# EAGLE board uirrc2 (EAGLE 9.6.2)
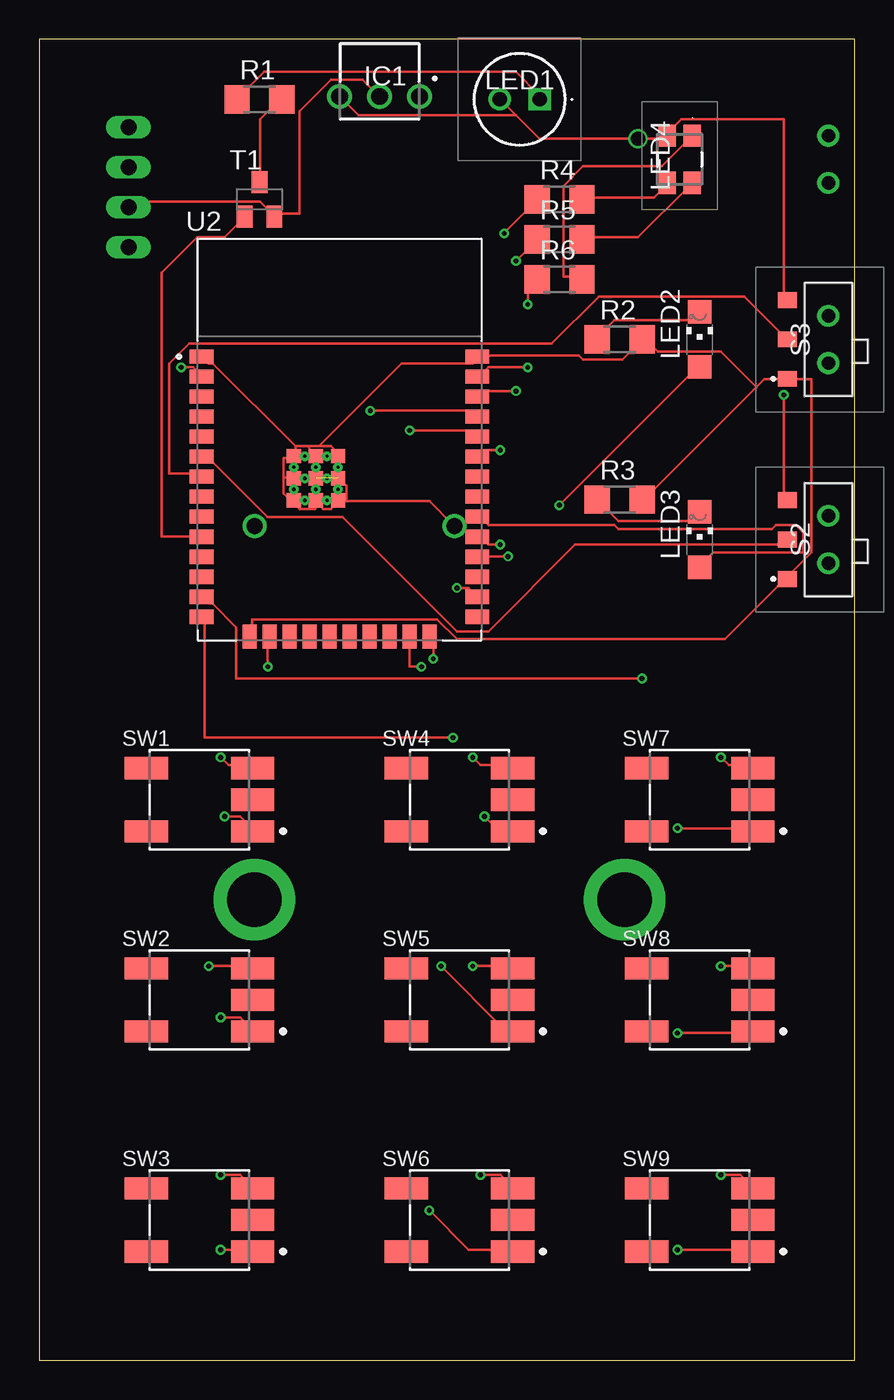
[diagram p0: board, top side]
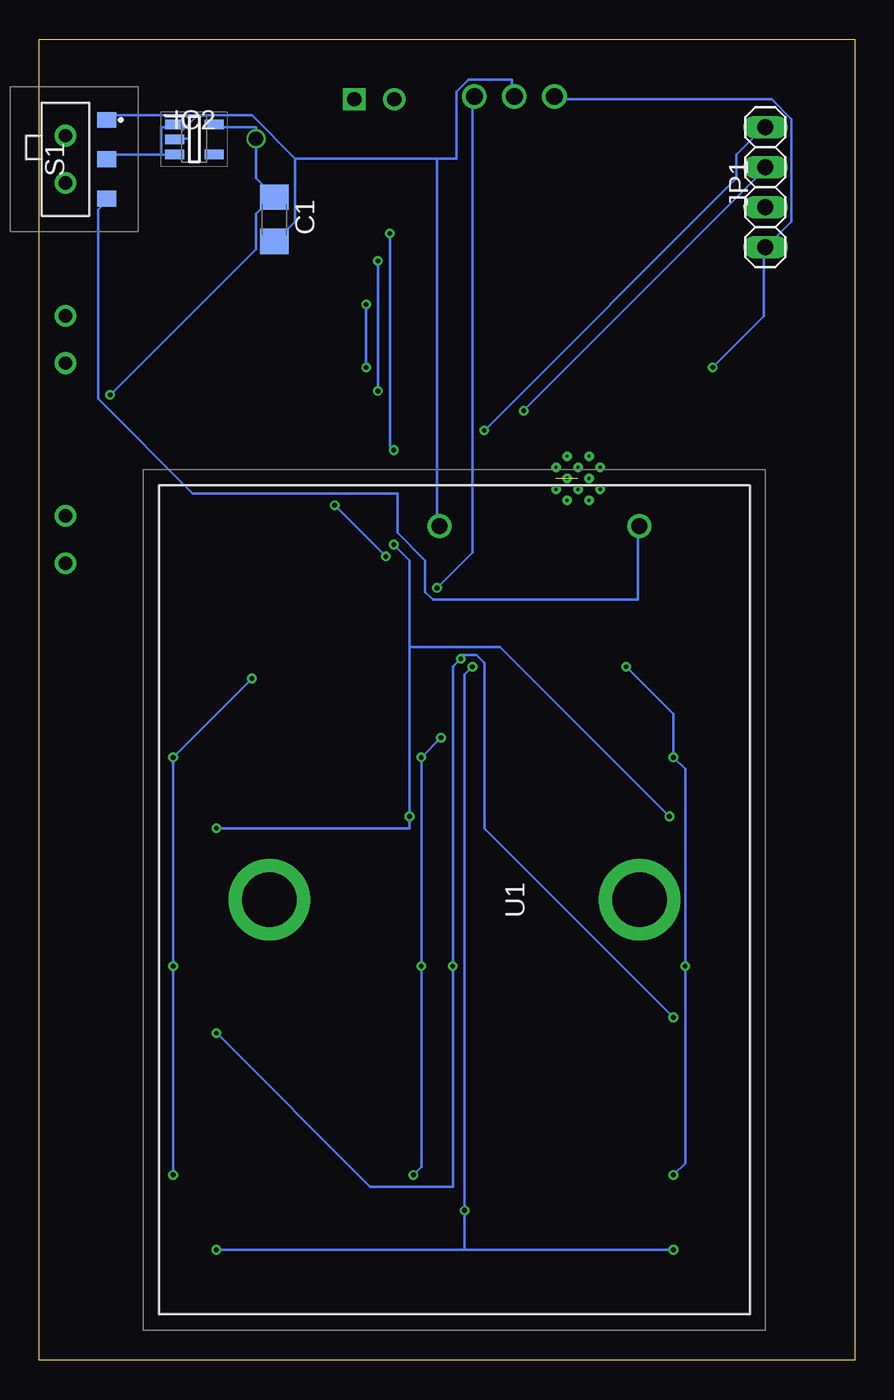
[diagram p1: board, bottom side, seen from below]

Size 51.74 x 83.81 mm. Coordinates in mm from the lower left corner, seen from the top.
Outline: 0,0 51.74,0 51.74,83.81 0,83.81 0,0
Copper layers (1*16): Top 0.035mm / dielectric 1.5mm / Bottom 0.035mm
Design rules "DesignRules": minimum track width 6mil, minimum drill 12mil, track to track 6mil, track to pad 6mil, pad to pad 6mil, via to via 6mil, smd to smd 6mil, copper to edge 20mil, drill to drill 8mil, minimum pad ring 8mil, minimum via ring 6mil, stop-mask expansion 3mil, vias tented up to drill 0mil, thermal gap 8mil

## Footprints (pad centres in the part's own frame; a part is rotated, then mirrored left to right if it is on the bottom)
C1206 = smd 1.6 x 1.8: 1 -1.4,0; 2 1.4,0
TSOP38238 = drill 1.06 pad 1.56: 1 -2.54,-1.45; 2 0,-1.45; 3 2.54,-1.45
SOT95P280X145-5N = smd 1.2 x 0.6: 1 -1.25,0.95; 2 -1.25,0; 3 -1.25,-0.95; 4 1.25,-0.95; 5 1.25,0.95
1X04 = drill 1.016 long: 1 -3.81,0; 2 -1.27,0; 3 1.27,0; 4 3.81,0
LTE4208 = drill 0.91 pad 1.416 square: 1 0,0 | drill 0.91 pad 1.416: 2 -2.54,0
CHIPLED_1206 = smd 1.5 x 1.5: A 0,-1.75; C 0,1.75
CLVBAFKACAEDH8BBB7A363 = smd 1.4 x 1.1: 1 -1.5,0.8; 2 -1.5,-0.8; 3 1.5,0.8; 4 1.5,-0.8
R1206 = smd 1.6 x 1.803: 1 -1.422,0; 2 1.422,0
AYZ0102AGRLC = smd 1 x 1.2: 1 -2.5,2.05; 2 0,2.05; 3 2.5,2.05 | drill 0.85 pad 1.381: 4 -1.5,-0.55; 5 1.5,-0.55
OMRON_B3SN-3112P_0 = smd 2.75 x 1.4: 1 3.375,-2; 2 -3.375,-2; 3 3.375,2; 4 -3.375,2; 5 3.375,0
SOT23-BEC = smd 1 x 1.4: B -0.95,-1.1; C 0,1.1; E 0.95,-1.1
2479 = drill 1.02 pad 1.53: 1 23.725,-11.75; 2 23.725,0.95 | drill 3.45 pad 5.175: 3 0.005,-11.75; 4 0.005,11.75
XCVR_ESP32-WROOM-32E_(16MB) = smd 1.5 x 0.9: 1 -8.75,5.26; 2 -8.75,3.99; 3 -8.75,2.72; 4 -8.75,1.45; 5 -8.75,0.18; 6 -8.75,-1.09; 7 -8.75,-2.36; 8 -8.75,-3.63; 9 -8.75,-4.9; 10 -8.75,-6.17; 11 -8.75,-7.44; 12 -8.75,-8.71; 13 -8.75,-9.98; 14 -8.75,-11.25; 25 8.75,-11.25; 26 8.75,-9.98; 27 8.75,-8.71; 28 8.75,-7.44; 29 8.75,-6.17; 30 8.75,-4.9; 31 8.75,-3.63; 32 8.75,-2.36; 33 8.75,-1.09; 34 8.75,0.18; 35 8.75,1.45; 36 8.75,2.72; 37 8.75,3.99; 38 8.75,5.26 | smd 0.9 x 1.5: 15 -5.715,-12.5; 16 -4.445,-12.5; 17 -3.175,-12.5; 18 -1.905,-12.5; 19 -0.635,-12.5; 20 0.635,-12.5; 21 1.905,-12.5; 22 3.175,-12.5; 23 4.445,-12.5; 24 5.715,-12.5 | smd 0.9 x 0.9: 39_1 -2.9,-1.06; 39_2 -1.5,-1.06; 39_3 -0.1,-1.06; 39_4 -2.9,-2.46; 39_5 -1.5,-2.46; 39_6 -0.1,-2.46; 39_7 -2.9,-3.86; 39_8 -1.5,-3.86; 39_9 -0.1,-3.86 | drill 0.2 pad 0.3: 39_10 -2.2,-1.06; 39_11 -0.8,-1.06; 39_12 -2.9,-1.76; 39_13 -1.5,-1.76; 39_14 -0.1,-1.76; 39_15 -2.2,-2.46; 39_16 -0.8,-2.46; 39_17 -2.9,-3.16; 39_18 -1.5,-3.16; 39_19 -0.1,-3.16; 39_20 -2.2,-3.86; 39_21 -0.8,-3.86

## Placement (x,y rotation side)
C1  1.0uF  [C1206]  36.83,72.39 270 bottom
IC1  TSOP38438  [TSOP38238]  21.59,78.74 180 top
IC2  MIC5205-3.3YM5-TR  [SOT95P280X145-5N]  41.91,77.47 0 bottom
JP1  [1X04]  5.66,74.44 90 bottom
LED1  LTE-4208  [LTE4208]  31.75,80.01 0 top
LED2  [CHIPLED_1206]  41.91,64.77 0 top
LED3  [CHIPLED_1206]  41.91,52.07 0 top
LED4  CLVBA-FKA-CAEDH8BBB7A363  [CLVBAFKACAEDH8BBB7A363]  40.64,76.2 270 top
R1  100  [R1206]  13.97,80.01 0 top
R2  471  [R1206]  36.83,64.77 0 top
R3  471  [R1206]  36.83,54.61 0 top
R4  471  [R1206]  33.02,73.66 0 top
R5  471  [R1206]  33.02,71.12 0 top
R6  471  [R1206]  33.02,68.58 0 top
S1  AYZ0102AGRLC  [AYZ0102AGRLC]  49.53,76.2 270 bottom
S2  AYZ0102AGRLC  [AYZ0102AGRLC]  49.53,52.07 90 top
S3  AYZ0102AGRLC  [AYZ0102AGRLC]  49.53,64.77 90 top
SW1  OMRON_B3SN-3112POMRON_B3SN-3112P_0_0  [OMRON_B3SN-3112P_0]  10.16,35.56 0 top
SW2  OMRON_B3SN-3112POMRON_B3SN-3112P_0_0  [OMRON_B3SN-3112P_0]  10.16,22.86 0 top
SW3  OMRON_B3SN-3112POMRON_B3SN-3112P_0_0  [OMRON_B3SN-3112P_0]  10.16,8.89 0 top
SW4  OMRON_B3SN-3112POMRON_B3SN-3112P_0_0  [OMRON_B3SN-3112P_0]  26.67,35.56 0 top
SW5  OMRON_B3SN-3112POMRON_B3SN-3112P_0_0  [OMRON_B3SN-3112P_0]  26.67,22.86 0 top
SW6  OMRON_B3SN-3112POMRON_B3SN-3112P_0_0  [OMRON_B3SN-3112P_0]  26.67,8.89 0 top
SW7  OMRON_B3SN-3112POMRON_B3SN-3112P_0_0  [OMRON_B3SN-3112P_0]  41.91,35.56 0 top
SW8  OMRON_B3SN-3112POMRON_B3SN-3112P_0_0  [OMRON_B3SN-3112P_0]  41.91,22.86 0 top
SW9  OMRON_B3SN-3112POMRON_B3SN-3112P_0_0  [OMRON_B3SN-3112P_0]  41.91,8.89 0 top
T1  [SOT23-BEC]  13.97,73.66 0 top
U1  2479  [2479]  25.4,29.21 90 bottom
U2  ESP32-WROOM-32E_(16MB)  [XCVR_ESP32-WROOM-32E_(16MB)]  19.05,58.42 0 top

## Library data of the parts
C1 = rcl; SPICEPREFIX: C
IC1 = TSOP38438; DESCRIPTION: IR Remote Receiver 38KHz 45m; HEIGHT: mm; MANUFACTURER_NAME: Vishay; MANUFACTURER_PART_NUMBER: TSOP38438; MOUSER_PART_NUMBER: 78-TSOP38438; MOUSER_PRICE-STOCK: https://www.mouser.co.uk/ProductDetail/Vishay-Semiconductors/TSOP38438?qs=fbkhFuCHoTaKUNuf%2Fea2zA%3D%3D
IC2 = MIC5205-3.3YM5-TR; DESCRIPTION: 150mA 1% Low Noise LDO MIC5205-3.3YM5 TR Microchip MIC5205-3.3YM5-TR, LDO Voltage Regulator, 150mA, 3.3 V 1%, 2.5 16 Vin, 5-Pin SOT-23; HEIGHT: 1.45mm; MANUFACTURER_NAME: Microchip; MANUFACTURER_PART_NUMBER: MIC5205-3.3YM5-TR; MOUSER_PART_NUMBER: 998-MIC5205-3.3YM5TR; MOUSER_PRICE-STOCK: https://www.mouser.co.uk/ProductDetail/Microchip-Technology-Atmel/MIC5205-3.3YM5-TR?qs=U6T8BxXiZAUfeWKvTx3acw%3D%3D
JP1 = pinhead
LED1 = LTE-4208; DESCRIPTION: Infrared Emitters Ired 940nm 5mm Water Clr 50mA; HEIGHT: 9.85mm; MANUFACTURER_NAME: Lite-On; MANUFACTURER_PART_NUMBER: LTE-4208; MOUSER_PART_NUMBER: 859-LTE4208; MOUSER_PRICE-STOCK: https://www.mouser.com/Search/Refine.aspx?Keyword=859-LTE4208
LED2 LED3 = led
LED4 = CLVBA-FKA-CAEDH8BBB7A363; DESCRIPTION: Cree,LED,CLVBA-FKA-CAEDH8BBB7A363 Cree CLVBA-FKA-CAEDH8BBB7A363 Green LED, 540 nm PLCC 4, Round Lens SMD package; HEIGHT: 2.1mm; MANUFACTURER_NAME: Wolfspeed; MANUFACTURER_PART_NUMBER: CLVBA-FKA-CAEDH8BBB7A363; MOUSER_PART_NUMBER: 941-VBAFKACAEDH8B7A3; MOUSER_PRICE-STOCK: https://www.mouser.co.uk/ProductDetail/Cree-LED/CLVBA-FKA-CAEDH8BBB7a363?qs=3AcK5DacLboXYkg4biCgSA%3D%3D
R1-R6 = rcl; SPICEPREFIX: R
S1-S3 = AYZ0102AGRLC; DESCRIPTION: Switch slide 100mA 12VDC SPDT PCB Slide Switch SPDT On-On 100 mA Slide; HEIGHT: 1mm; MANUFACTURER_NAME: C & K COMPONENTS; MANUFACTURER_PART_NUMBER: AYZ0102AGRLC; MOUSER_PART_NUMBER: 611-AYZ0102AGRLC; MOUSER_PRICE-STOCK: https://www.mouser.co.uk/ProductDetail/CK/AYZ0102AGRLC?qs=dJbzCyn%252BCFYWKwcWEToS6A%3D%3D
SW1-SW9 = Omron - B3SN-3112P; AMBIENT_TEMPERATURE_RANGE_HIGH: +70°C; AMBIENT_TEMPERATURE_RANGE_LOW: -25°C; AUTOMOTIVE: No; CENTROID_NOT_SPECIFIED: No; CONTACT_CURRENT_RATING: 50mA; CONTACT_RESISTANCE: 100mΩ; DATASHEET: https://omronfs.omron.com/en_US/ecb/products/pdf/en-b3sn.pdf; DEVICE_CLASS_L1: Electromechanical; DEVICE_CLASS_L2: Switches; DEVICE_CLASS_L3: Tactile Switches; DIGIKEY_DESCRIPTION: SWITCH TACTILE SPST-NO 0.05A 24V; DIGIKEY_PART_NUMBER: SW262CT-ND; ELECTROMECHANICAL_LIFE: 100000Cycles; FOOTPRINT_VARIANT_NAME_0: Recommended_Land_Pattern; LEAD_FREE: Yes; MF: Omron; MFG_PACKAGE_IDENT: 0; MFG_PACKAGE_IDENT_DATE: 0; MFG_PACKAGE_IDENT_REV: 0; MOUNT: Surface Mount; MOUSER_DESCRIPTION: Switch Tactile N.O. SPST Round Button J-Bend 0.05A 24VDC 50000Cycle 1.57N SMD Embossed Tape; MOUSER_PART_NUMBER: 653-B3SN-3112P; MPN: B3SN-3112P; OPERATING_FORCE: 1.57N; PACKAGE: SMT_SW_6MM0_6MM0; PREFIX: SW; ROHS: Yes; STANDOFF_HEIGHT: 3.4mm; TEMPERATURE_RANGE_HIGH: +70°C; TEMPERATURE_RANGE_LOW: -25°C; THROW_CONFIGURATION: SPST-NO; VERIFICATION_VERSION: 0.0.0.3; VOLTAGE_RATING_DC: 24V
T1 = transistor
U1 = 2479; DESCRIPTION: KEYSTONE - 2479 - BATTERY HOLDER, AAA, 3WAY; HEIGHT: 13mm; MANUFACTURER_NAME: Keystone Electronics; MANUFACTURER_PART_NUMBER: 2479; MOUSER_PART_NUMBER: 534-2479; MOUSER_PRICE-STOCK: https://www.mouser.co.uk/ProductDetail/Keystone-Electronics/2479?qs=Q3RoVmURDomBPD85HfXZoA%3D%3D
U2 = ESP32-WROOM-32E__16MB_; AVAILABILITY: Not in stock; DESCRIPTION: Bluetooth, WiFi 802.11b/g/n, Bluetooth v4.2 +EDR, Class 1, 2 and 3 Transceiver Module 2.4GHz ~ 2.5GHz Integrated, Trace Surface Mount; MF: Espressif Systems; MP: ESP32-WROOM-32E (16MB); PACKAGE: None; PRICE: None

## Nets
+3V3: C1.1 IC1.3 IC2.5 JP1.1 LED1.2 LED4.2 S2.3 S3.3 U2.2
BUTTON_C1: SW1.3 SW2.3 SW3.3 U2.16
BUTTON_C2: SW4.3 SW5.3 SW6.3 U2.14
BUTTON_C3: SW7.3 SW8.3 SW9.3 U2.13
BUTTON_R1: SW1.1 SW4.1 SW7.1 U2.29
BUTTON_R2: SW2.1 SW5.1 SW8.1 U2.24
BUTTON_R3: SW3.1 SW6.1 SW9.1 U2.23
EN: U2.3
GND: C1.2 IC1.2 IC2.2 JP1.2 R2.2 R3.2 S1.1 S2.1 S3.1 T1.E U1.2 U2.1 U2.15 U2.38 U2.39_1 U2.39_2 U2.39_3 U2.39_4 U2.39_5 U2.39_6 U2.39_7 U2.39_8 U2.39_9
IO0: U2.25
IR_RX: IC1.1 U2.26
IR_TX: T1.B U2.10
LEARN_EN: S3.2 U2.7
LEARN_LED: LED3.A U2.30
N$1: LED1.1 R1.1
N$2: R1.2 T1.C
N$3: LED4.4 R4.2
N$4: LED4.3 R5.2
N$9: LED4.1 R6.2
N$11: S1.3 U1.1
N$13: R4.1 U2.33
N$14: R5.1 U2.36
N$15: R6.1 U2.37
N$16: IC2.1 IC2.3 S1.2
N$18: LED3.C R3.1
N$20: LED2.C R2.1
PROFILE_T: U2.31
USB_RXD: JP1.3 U2.35
USB_TXD: JP1.4 U2.34
WIFI_EN: S2.2 U2.6
WIFI_LED: LED2.A U2.28

## Tracks (layer width: path | path; a pad name or v marks a point on that pad's centre or on a via)
+3V3  (via drill 0.3, 0.9)
  Top 0.152: v47.25,61.25 47.25,54.75 S2.3 | v9,63 9.75,63 10.25,62.5 U2.2 | S3.3 47.25,67.5 47.25,78.75 40.75,78.75 39.75,77.75 LED4.2 39.75,77.5 v38,77.5 31.75,77.5 30.25,79 | 30.25,79 29.25,80 LED1.2 | 30.25,79 20.25,79 19.25,80 IC1.3
  Bottom 0.152: v47.25,61.25 38,70.5 38,72.75 37,73.75 C1.1 37,74 38,75 v38,77.5 38,78.25 40.5,78.25 IC2.5 | v9,63 5.75,66.25 5.75,70.5 JP1.1 5.5,70.75 4,72.25 4,78.75 5.25,80 19,80 IC1.3
BUTTON_C1  (via drill 0.3)
  Top 0.152: v14.5,44 14.5,45.75 U2.16 | v11.5,38.25 12,37.75 13.5,37.75 SW1.3 | v11.5,11.75 12.75,11.75 13.5,11 SW3.3 | v10.75,25 13.5,25 SW2.3
  Bottom 0.152: v14.5,44 11.5,41 v11.5,38.25 10.75,37.5 v10.75,25 10.75,12.5 v11.5,11.75
BUTTON_C2  (via drill 0.3)
  Top 0.152: v26.25,39.5 10.5,39.5 10.5,47 U2.14 | v27.5,38.25 28,37.75 30,37.75 SW4.3 | v28,11.75 29.25,11.75 30,11 SW6.3 | v27.5,25 30,25 SW5.3
  Bottom 0.152: v26.25,39.5 v27.5,38.25 v27.5,25 27.5,12.25 v28,11.75
BUTTON_C3  (via drill 0.3)
  Top 0.152: v38.25,43.25 12.5,43.25 12.5,46.5 11,48 10.75,48 10.5,48.25 U2.13 | v43.25,38.25 43.75,37.75 45.25,37.75 SW7.3 | v43.25,11.75 44.5,11.75 45.25,11 SW9.3 | v43.25,25 45.25,25 SW8.3
  Bottom 0.152: v38.25,43.25 v43.25,38.25 v43.25,25 v43.25,11.75
BUTTON_R1  (via drill 0.3)
  Top 0.152: v29.25,51.75 28.5,51.75 28,52.25 U2.29 | v28.25,34.5 29,33.75 30,33.75 SW4.1 | v11.75,34.5 12.75,34.5 13.5,33.75 SW1.1 | v40.5,33.75 45.25,33.75 SW7.1
  Bottom 0.152: v29.25,51.75 28.25,50.75 28.25,45.25 | 28.25,45.25 v28.25,34.5 28.25,33.75 v40.5,33.75 | v11.75,34.5 22.5,45.25 28.25,45.25
BUTTON_R2  (via drill 0.3)
  Top 0.152: v25,44.5 25,45.75 U2.24 | v25.5,25 29.5,21 30,21 SW5.1 | v11.5,21.75 12.75,21.75 13.5,21 SW2.1 | v40.5,20.75 45.25,20.75 SW8.1
  Bottom 0.152: v11.5,21.75 23.5,33.75 23.5,44.25 24,44.75 25,44.75 v25,44.5 25.5,44 v25.5,25 25.5,11 30.75,11 v40.5,20.75
BUTTON_R3  (via drill 0.3)
  Top 0.152: v24.25,44 23.5,44 23.5,45.75 U2.23 | v24.75,9.5 27.25,7 30,7 SW6.1 | v11.5,7 13.5,7 SW3.1 | v40.5,7 45.25,7 SW9.1
  Bottom 0.152: v24.25,44 24.75,43.5 v24.75,9.5 24.75,7 | 24.75,7 v11.5,7 | 24.75,7 v40.5,7
GND  (1 unrouted)
  Top 0.152: JP1.2 5.75,73.25 6,73.5 14,73.5 14.75,72.75 T1.E 15,72.75 16.5,72.75 16.5,79.25 18.5,81.25 20.5,81.25 21.5,80.25 IC1.2 | 17.75,54.25 18,54 18.5,54 19,54.5 | 17.75,54.25 17.5,54.5 U2.39_8 17.75,54.25 | 19.5,54.5 19.5,55.5 19,56 U2.39_6 | 19,54.5 19.5,54.5 | 19,54.5 U2.39_9 | 16,54.5 15.5,55 15.5,56 | 15.5,56 16,56 U2.39_4 | 16.25,58 16.25,57.5 U2.39_1 16,57.25 15.5,57.25 15.5,56 | 17,58 16.25,58 | 17,58 17.5,57.5 U2.39_2 | 17,58 17.75,58 | 17.75,58 18.5,58 19,57.5 U2.39_3 | 16.25,58 11,63.25 10.75,63.25 10.5,63.5 U2.1 | 17.75,58 23,63.25 27.5,63.25 27.75,63.5 U2.38 28,63.75 34.25,63.75 34.5,63.5 37,63.5 38.25,64.75 R2.2 38.5,64.75 39.25,64 43.25,64 45.5,61.75 | 17.75,54.25 17.5,54 16.5,54 16,54.5 | 16,54.5 U2.39_7 | 19.5,54.5 24.75,54.5 26.25,53 U1.2 | U2.15 13.5,46 13.5,47 25.25,47 26.5,45.75 43.5,45.75 47.25,49.5 S2.1 47.5,49.75 49,51.25 49,62.25 47.5,62.25 S3.1 47.25,62.25 46,62.25 45.5,61.75 | 45.5,61.75 38.5,54.75 R3.2
  Bottom 0.152: 42.5,79 42.25,78.75 42.25,77.5 43,77.5 IC2.2 | 42.5,79 47.25,79 47.25,78.75 S1.1 | 35.5,76.25 35.5,72.25 36.75,71 C1.2 | 35.5,76.25 38.25,79 42.5,79 | 26.5,76.25 25.25,76.25 25.25,80.5 24.5,81.25 21.75,81.25 21.75,80.25 IC1.2 | 26.5,76.25 35.5,76.25 | 26.5,76.25 26.5,53 U1.2
IR_RX  (via drill 0.3)
  Top 0.152: v26.5,49 27.25,49 27.75,48.5 U2.26
  Bottom 0.152: v26.5,49 24.25,51.25 24.25,80 IC1.1
IR_TX
  Top 0.152: U2.10 7.75,52.25 7.75,69 10,71.25 11.75,71.25 13,72.5 T1.B
LEARN_EN
  Top 0.152: S3.2 44.75,67.5 35.5,67.5 32.5,64.5 9.5,64.5 8.25,63.25 8.25,56.25 10.25,56.25 U2.7
LEARN_LED
  Top 0.152: U2.30 28,53.5 28.5,53 36.5,53 36.75,52.75 46.5,52.75 46.75,53 48,53 48.5,52.5 48.5,51.25 42.75,51.25 42,50.5 LED3.A
N$1
  Top 0.152: R1.1 12.75,80.25 14.25,81.75 30.25,81.75 31.75,80.25 LED1.1
N$2
  Top 0.152: T1.C 14,75 14,78.75 15.25,80 R1.2
N$3
  Top 0.152: LED4.4 39.75,74.5 39,73.75 34.5,73.75 R4.2
N$4
  Top 0.152: LED4.3 41.25,74.5 38,71.25 34.5,71.25 R5.2
N$9
  Top 0.152: LED4.1 41.25,77.5 39.5,75.75 34.5,75.75 33.25,74.5 33.25,68.75 34.25,68.75 R6.2
N$11
  Bottom 0.152: S1.3 47.5,73.5 48,73 48,61 42,55 29,55 29,52.5 27.25,50.75 27.25,48.75 26.75,48.25 13.75,48.25 13.75,52.75 U1.1
N$13  (via drill 0.3)
  Top 0.152: v29.25,57.75 28.25,57.75 28,57.5 U2.33 | v29.5,71.5 31.5,73.5 R4.1
  Bottom 0.152: v29.25,57.75 29.5,58 v29.5,71.5
N$14  (via drill 0.3)
  Top 0.152: v30.25,61.5 28.25,61.5 28,61.25 U2.36 | v30.25,69.75 31.5,71 R5.1
  Bottom 0.152: v30.25,69.75 v30.25,61.5
N$15  (via drill 0.3)
  Top 0.152: v31,63 28.5,63 28,62.5 U2.37 | v31,67 31,68.5 31.5,68.5 R6.1
  Bottom 0.152: v31,67 v31,63
N$16
  Bottom 0.152: 44,76.5 47.25,76.5 47.25,76.25 S1.2 | 44,76.5 43.25,76.5 IC2.3 | 44,76.5 44,78.25 43.25,78.25 IC2.1
N$18
  Top 0.152: LED3.C 41.75,53.75 41.25,53.25 36.75,53.25 35.5,54.5 R3.1
N$20
  Top 0.152: LED2.C 41.75,66.5 41.25,66 36.5,66 35.5,65 R2.1
USB_RXD  (via drill 0.3)
  Top 0.152: v21,60.25 27.5,60.25 27.75,60 U2.35
  Bottom 0.152: v21,60.25 5.75,75.5 JP1.3
USB_TXD  (via drill 0.3)
  Top 0.152: v23.5,59 27.5,59 27.75,58.75 U2.34
  Bottom 0.152: v23.5,59 7.5,75 7.5,76.5 5.75,78.25 JP1.4
WIFI_EN
  Top 0.152: S2.2 47.25,52 47,51.75 34,51.75 28.5,46.25 26.5,46.25 19.25,53.5 14.5,53.5 10.75,57.25 10.5,57.25 U2.6
WIFI_LED  (via drill 0.3)
  Top 0.152: v29.75,51 28,51 U2.28 | v33,54.25 41.75,63 LED2.A
  Bottom 0.152: v33,54.25 v29.75,51